# Altium PCB Wings_SMD_Breakout_0.1c.PcbDoc (part 1 of 2)
Units mm, origin at the board's own origin, x right, y up, seen from the top; angles counter-clockwise.
Board outline 50.8 x 30 mm, 2 copper layers (Top Layer, Bottom Layer), stack 1.569 mm thick; 53 components, 56 nets, 200 pads, 251 vias.
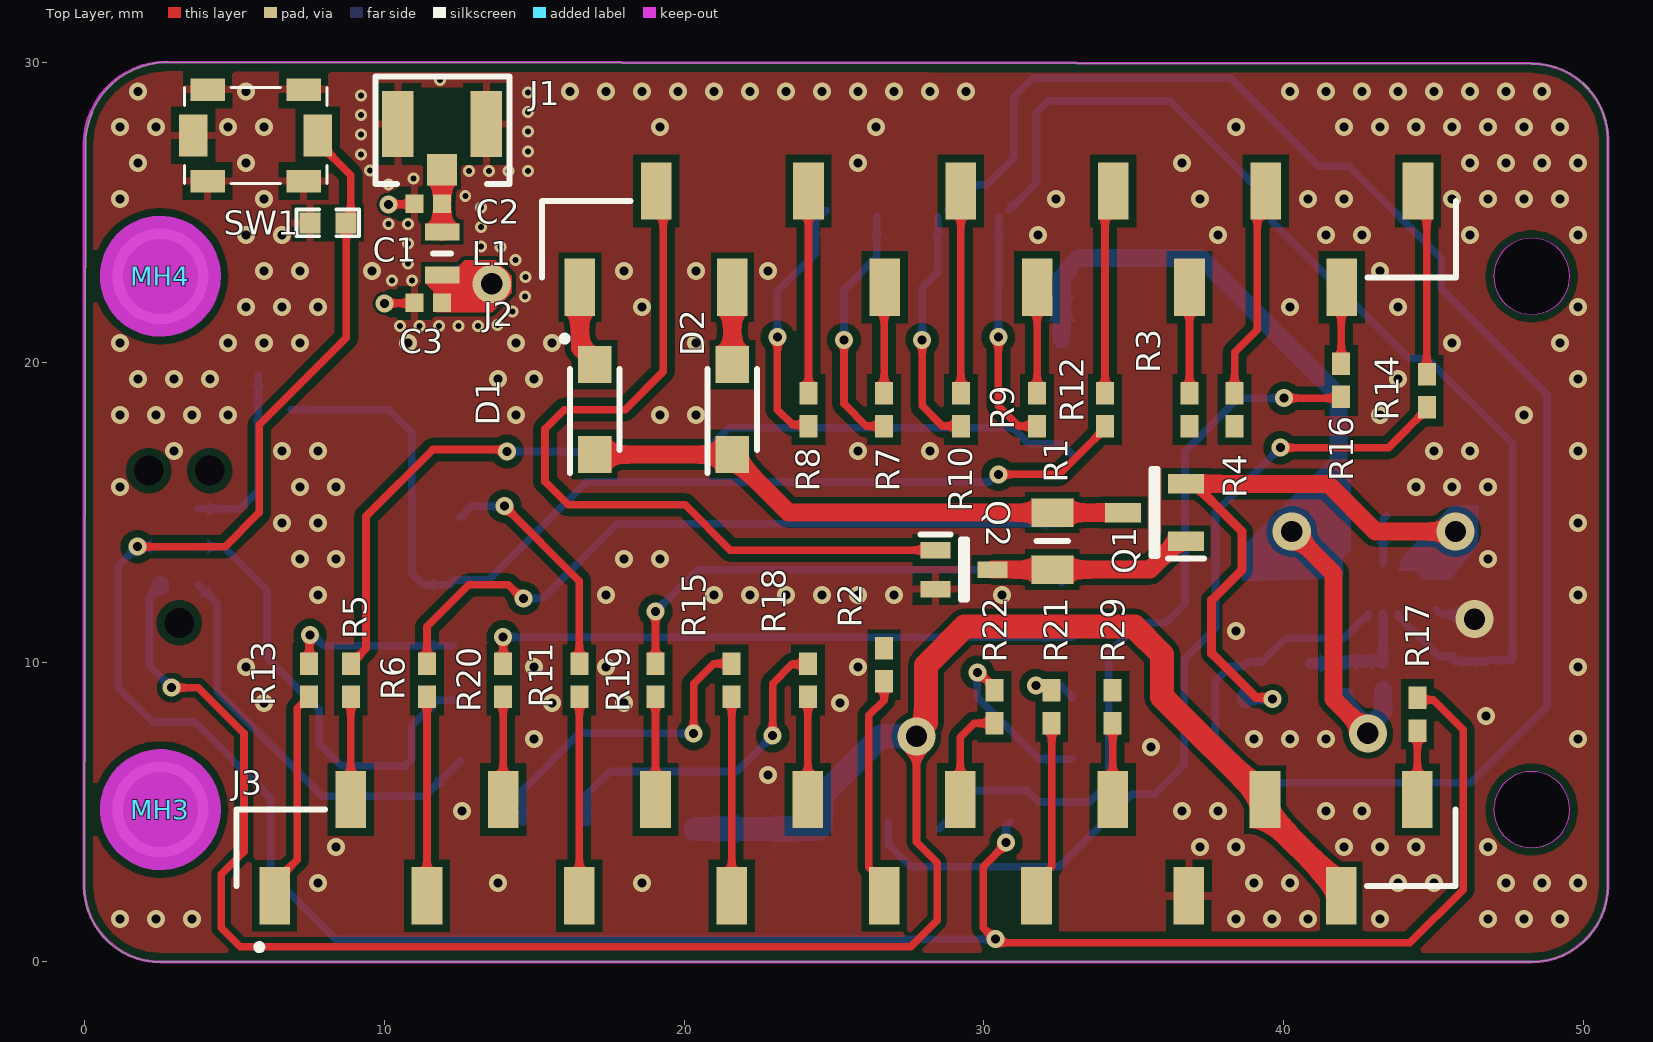
[diagram p0: Top Layer view]
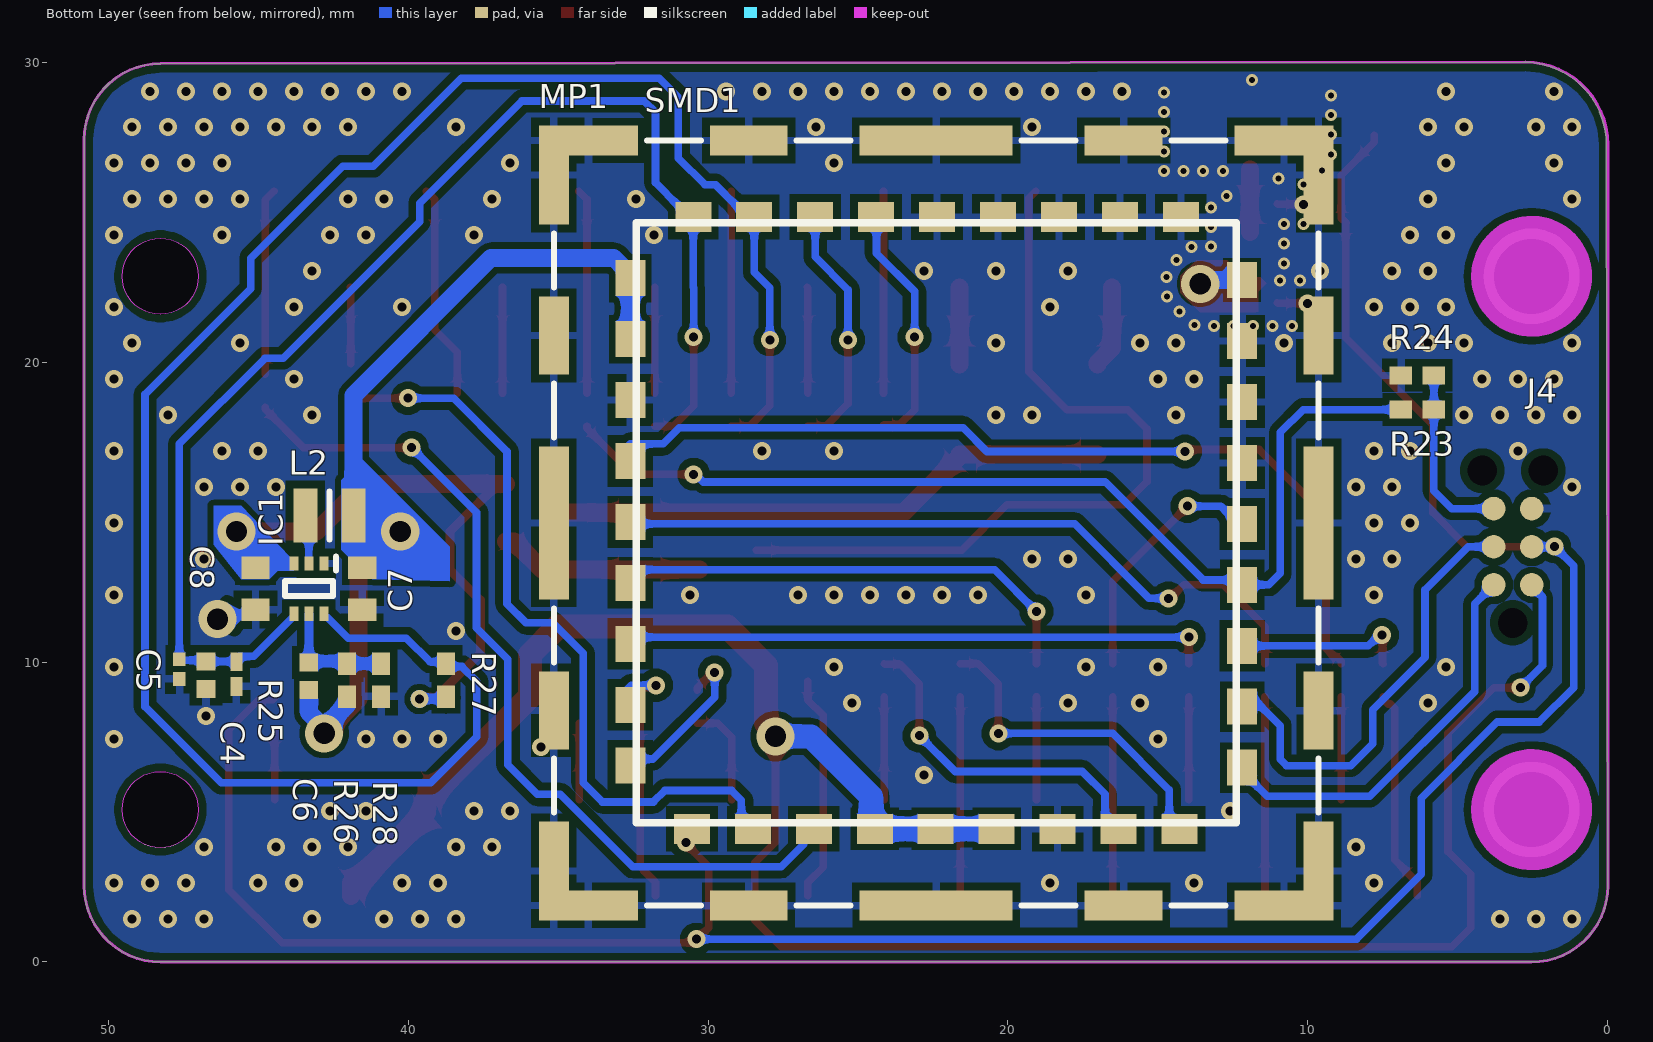
[diagram p1: Bottom Layer view, seen from below]
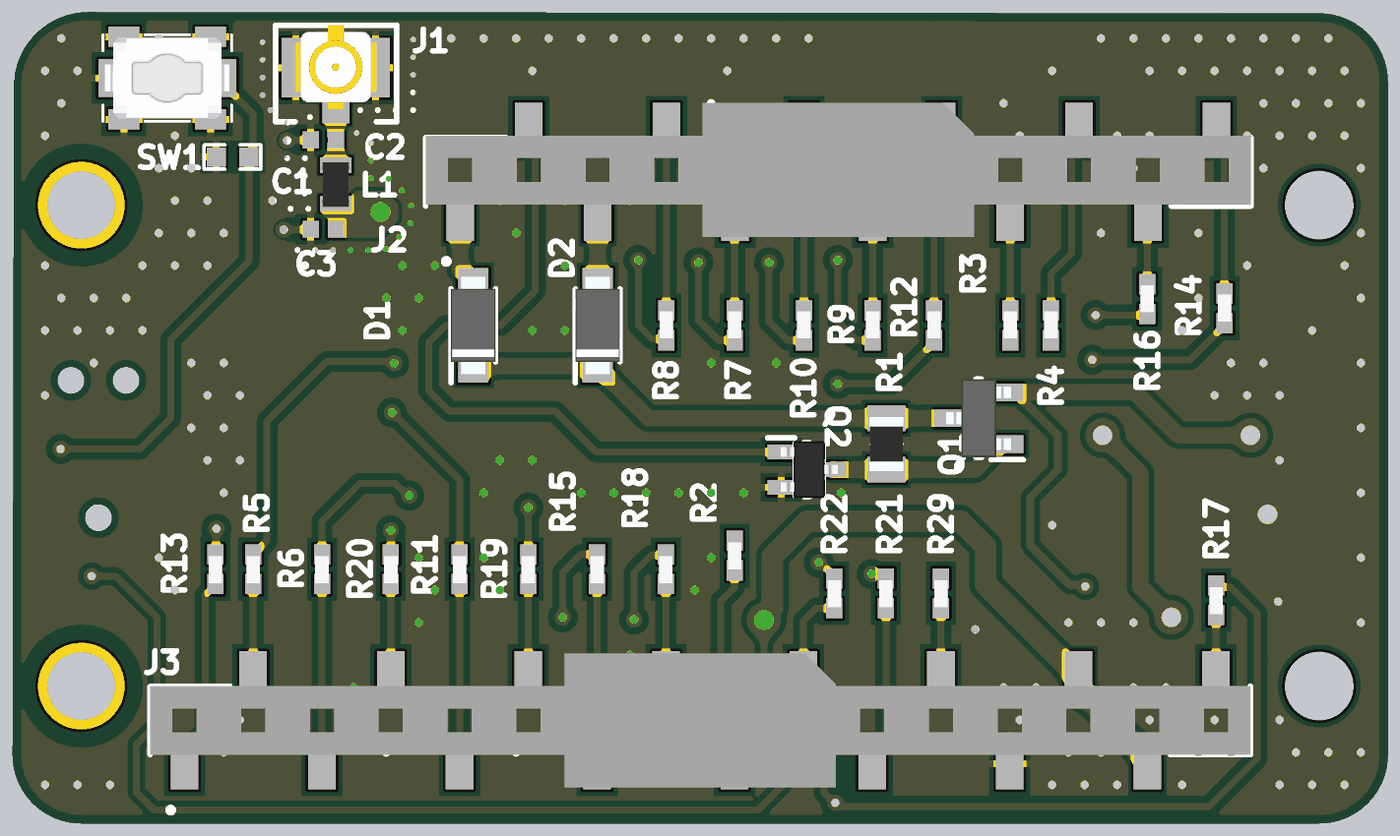
[diagram p2: 3D render of the assembled board from above, using the file's embedded part models]
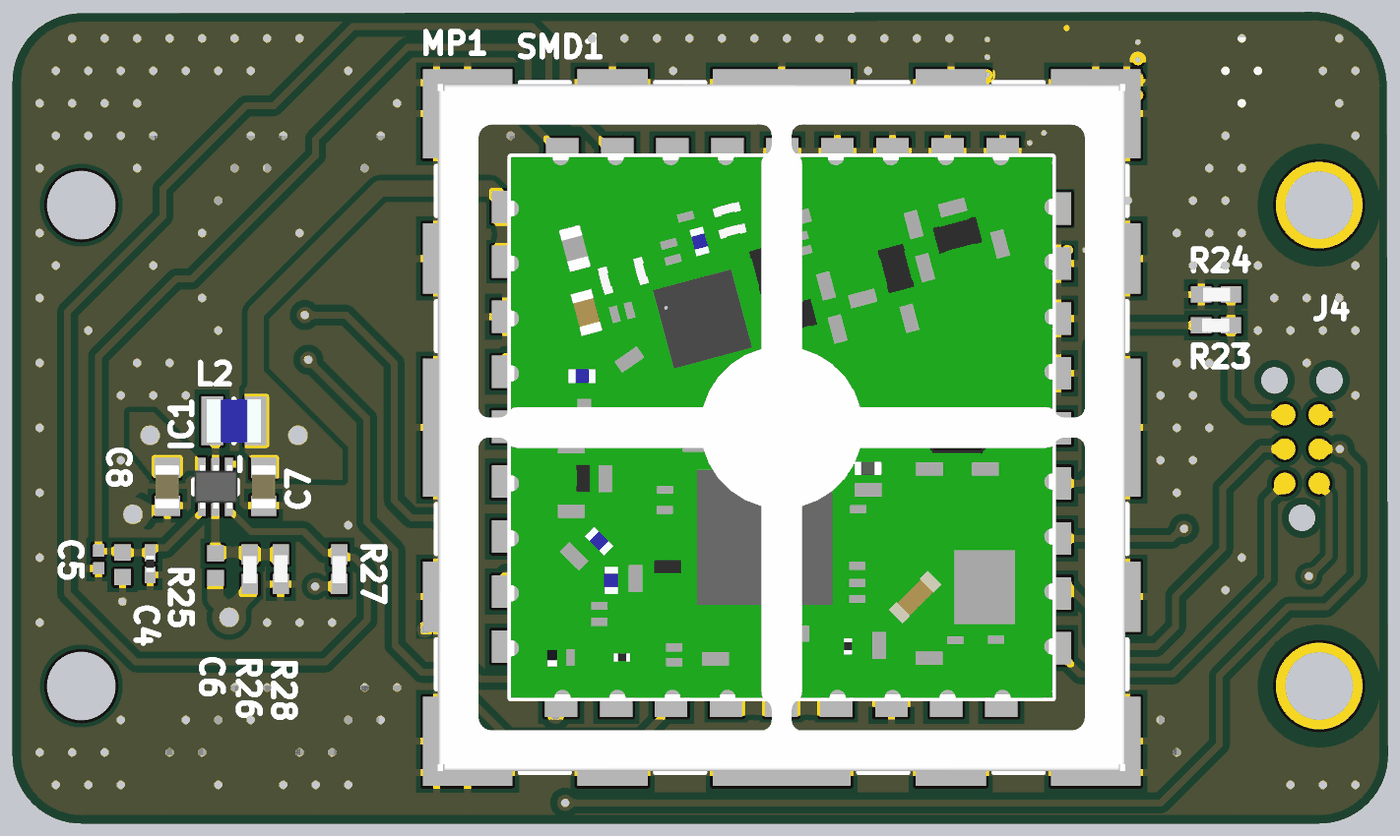
[diagram p3: 3D render of the assembled board from below, using the file's embedded part models]

## Layer stack, top to bottom
Top Solder: solder mask 0.0254, SM-001, Dk 4
Top Layer: signal copper 0.035
Dielectric 1: core 1.4986, Core-043, Dk 4.3
Bottom Layer: signal copper 0.035
Bottom Solder: solder mask 0.0254, SM-001, Dk 4

## Board outline
2.54,0 cw(c2.54,2.54) 0,2.54 0.05,27.246 cw(c2.804,27.246) 2.804,30 48.26,29.95 cw(c48.26,27.41) 50.8,27.41 50.8,2.54 cw(c48.26,2.54) 48.26,0
cut-out: 48.26,3.81 ccw(c48.26,5.08) 49.53,5.08 ccw(c48.26,5.08) 48.26,6.35 ccw(c48.26,5.08) 46.99,5.08 ccw(c48.26,5.08)
cut-out: 48.26,21.59 ccw(c48.26,22.86) 49.53,22.86 ccw(c48.26,22.86) 48.26,24.13 ccw(c48.26,22.86) 46.99,22.86 ccw(c48.26,22.86)

## Design rules (kind name [scope] priority, off if disabled: settings)
Clearance Clearance_RF [InNet('NetC2_2')or InNet('NetC3_1')] p1: gap=0.127 ignorepadtopadclearanceinfootprint=FALSE
Clearance Clearance_PWR [InNetClass('PWR')] p2: gap=0.2 ignorepadtopadclearanceinfootprint=FALSE except(0.15: Arc-SMDPad Track-SMDPad SMDPad-SMDPad)
Clearance [All] p3: gap=0.254 ignorepadtopadclearanceinfootprint=FALSE except(0.15: Arc-SMDPad Track-SMDPad SMDPad-SMDPad THPad-THPad; 0.2: Arc-Arc Arc-Track Track-Track)
MinimumSolderMaskSliver [All] p1: minsoldermaskwidth=0.1
PlaneClearance PlaneClearance_GND [InNet('GND')] p1: clearance=0
PlaneClearance [All] p2: clearance=0.508
PlaneConnect PlaneConnect_GND [InNet('GND')] p1: pad.planeconnectstyle=Relief pad.reliefexpansion=0.508 pad.reliefentries=4 pad.reliefconductorwidth=0.254 pad.reliefairgap=0.254 via.planeconnectstyle=Direct via.reliefexpansion=0.508 via.reliefentries=4 via.reliefconductorwidth=0.254 via.reliefairgap=0.254
PlaneConnect [All] p2: planeconnectstyle=Relief reliefexpansion=0.508 reliefentries=4 reliefconductorwidth=0.254 reliefairgap=0.254
PolygonConnect PolygonConnect_GND [InNet('GND') vs InNet('GND')] p1: thpad.connectstyle=Direct thpad.reliefconductorwidth=0.254 thpad.reliefentries=4 thpad.polygonreliefangle="90 Angle" thpad.airgapwidth=0.254 smdpad.connectstyle=Relief smdpad.reliefconductorwidth=0.254 smdpad.reliefentries=4 smdpad.polygonreliefangle="90 Angle" smdpad.airgapwidth=0.254 via.connectstyle=Direct via.reliefconductorwidth=0.254 via.reliefentries=4 via.polygonreliefangle="90 Angle" via.airgapwidth=0.254
PolygonConnect [All] p2: connectstyle=Relief reliefconductorwidth=0.254 reliefentries=4 polygonreliefangle="90 Angle" airgapwidth=0.254
RoutingPriority RoutingPWR [InNetClass('PWR')] p1: routingpriority=0
RoutingPriority RoutingDBG [InNetClass('UART')] p2: routingpriority=1
RoutingPriority RoutingSPI [All] p3: routingpriority=3
RoutingPriority RoutingI2C [All] p4: routingpriority=2
RoutingPriority RoutingDiGI [All] p5: routingpriority=5
RoutingPriority RoutingANALOG [All] p6: routingpriority=4
RoutingPriority RoutingALL [All] p7: routingpriority=6
RoutingVias [All] p1: holewidth=0.711 width=1.27 viastyle="Through Hole" minholewidth=0.3 minwidth=0.6 maxholewidth=0.711 maxwidth=1.27
SolderMaskExpansion [All] p1: expansion=0.102 istentingtop=FALSE
Width Width_RF [InNet('NetC2_2')or InNet('NetC3_1')] p1: maxlimit=0.8 minlimit=0.254 preferedwidth=0.6 minimp=50.000000 maximp=50.000000 favimp=50.000000
Width Width_PWR [InNetClass('PWR')] p2: maxlimit=1 minlimit=0.254 preferedwidth=0.6
Width [All] p3: maxlimit=0.4 minlimit=0.254 preferedwidth=0.254 minimp=50.000000 maximp=50.000000 favimp=50.000000
26 further rules are at their usual default settings.

## Classes and differential pairs
net class ANALOG: A0 A1 A2 A3 NetR21_1 NetR22_1
net class DIGITAL: D4 D5 D6 D9 D10 D11 D12 D13 D24 D25 DBG_RF-BUSY DBG_RF-NRST EN F_NRST NetIC1_2 NetR7_1 NetR8_1 NRST SPI_NSS VPA_EN
net class I2C: I2C_SCL I2C_SDA SCL SDA
net class SPI: D4 F_MISO F_MOSI F_SCK SPI_MISO SPI_MOSI SPI_NSS SPI_SCK
net class UART: F_RX F_TX LPUART_RX LPUART_TX
net class DBG: D9 D24 D25 DBG_RF-BUSY DBG_RF-NRST DBG_SWCLK DBG_SWDIO DBG_SWO
net class PWR: F_3V3 NetD1_1 NetQ1_1 VBAT VBUS VDD VPA_VDD
component class U_TPS62A01DRL_Buck_3V3: C4 C5 C6 C7 C8 IC1 L2 R25 R26 R27 R28
component class U_SMD_Breakout: "\"" C1 C2 C3 C? D1 D2 J1 J2 J3 J4 J? L1 MP1 Q1 Q2 R1 R2 R3 R4 R5 R6 R7 R8 R9 R10 R11 R12 R13 R14 R15 R16 R17 R18 R19 R20 R21 R22 R23 R24 R29 S SMD1 SMD? SW1 SW?

## Components (designator, comment, footprint, x,y, rotation, side; value= is the part's Value field where it differs from the comment)
C1 "GRM155R71C104KA88D" 0402 7.493,24.638 r0 top
C2 "NC" CAPC1005X55N 11.478,25.273 r0 top
C3 "CC0402BRNPO9BN3R6" CAPC1005X55N 11.478,21.971 r180 top
C4 "1uF" CAPC1005X55N 46.736,9.563 r90 bottom (schematic designator C1)
C5 "GRM033R61C104KE14D" CAPC0603X33N 47.625,9.763 r90 bottom value=100nF (schematic designator C2)
C6 "GRM1555C1H121JA01D" CAPC1005X55N 43.307,9.525 r270 bottom (schematic designator C3)
C7 "GRM188R61A226ME15J" CAPC1608X90N 41.529,12.446 r90 bottom (schematic designator C4)
C8 "GRM188Z71A475ME15D" CAPC1608X90N 45.085,12.446 r90 bottom (schematic designator C5)
D1 "MBR120LSFT3G" SODFL3616X98N 17.018,18.415 r90 top
D2 "MBR120LSFT3G" SODFL3616X98N 21.61,18.415 r90 top
IC1 "TPS62A01DRLR" SOTFL50P160X60-6N 43.307,12.446 r270 bottom
J1 "20279-001E-01" "MHF SMT REC" 11.938,27.94 r270 top
J2 "SSM-112-F-SV-P-TR" SAMTEC_SSM-112-F-SV-P-TR 30.5,24.096 r180 top
J3 "SSM-116-F-SV-P-TR" SAMTEC_SSM-116-F-SV-P-TR 25.4,3.81 r180 top
J4 "TC2030-NL" TC2030NL 3.175,11.303 r90 bottom
L1 "LQW18AN18NG8ZD" LQW18AN10NG80D 11.938,23.622 r90 top
L2 "DFE201612P-1R0M=P2" 1286ASH1R0MP2 42.625,14.883 r180 bottom (schematic designator L1)
MH3 "" MOUNTINGHOLE_2.5_PLATED#1 2.54,5.08 r270 top
MH4 "" MOUNTINGHOLE_2.5_PLATED#2 2.54,22.86 r270 top
MP1 "36103255S" 36103255S 22.392,14.638 r180 bottom
Q1 "DMG3415U-7" SOT96P240X120-3N 35.687,14.981 r180 top
Q2 "BSS138BKW,115" SOT65P210X110-3N 29.337,13.081 r0 top
R1 "RC0805JR07100KL" RESC2012X60N 32.278,14.031 r270 top
R2 "NC" RESC1005X40N 26.67,9.906 r270 top
R3 "NC" RESC1005X40N 36.85,18.415 r90 top
R4 "NC" RESC1005X40N 38.354,18.415 r90 top
R5 "0R" RESC1005X40N 8.89,9.398 r270 top
R6 "0R" RESC1005X40N 11.43,9.398 r270 top
R7 "0R" RESC1005X40N 26.67,18.415 r90 top
R8 "0R" RESC1005X40N 24.15,18.415 r90 top
R9 "0R" RESC1005X40N 31.77,18.415 r90 top
R10 "0R" RESC1005X40N 29.23,18.415 r90 top
R11 "0R" RESC1005X40N 16.51,9.398 r270 top
R12 "0R" RESC1005X40N 34.036,18.415 r90 top
R13 "0R" RESC1005X40N 7.493,9.398 r270 top
R14 "0R" RESC1005X40N 44.762,19.047 r90 top
R15 "0R" RESC1005X40N 21.59,9.398 r270 top
R16 "0R" RESC1005X40N 41.91,19.388 r90 top
R17 "NC" RESC1005X40N 44.45,8.255 r270 top
R18 "0R" RESC1005X40N 24.13,9.398 r270 top
R19 "0R" RESC1005X40N 19.05,9.398 r270 top
R20 "0R" RESC1005X40N 13.97,9.398 r270 top
R21 "0R" RESC1005X40N 32.258,8.509 r270 top
R22 "0R" RESC1005X40N 30.353,8.509 r270 top
R23 "NC" RESC1005X40N 6.35,18.415 r0 bottom
R24 "0R" RESC1005X40N 6.35,19.558 r180 bottom
R25 "100K" RESC0603X28N 45.72,9.598 r270 bottom value=100KR (schematic designator R1)
R26 "RC0402FR-07464KL" RESC1005X40N 42.037,9.398 r270 bottom (schematic designator R2)
R27 "RC0402FR-07499KL" RESC1005X40N 38.735,9.398 r270 bottom (schematic designator R3)
R28 "RT0402FRE07100KL" RESC1005X40N 40.894,9.398 r90 bottom (schematic designator R4)
R29 "NC" RESC1005X40N 34.29,8.509 r270 top (schematic designator R25)
SMD1 "stm32wl-SMD" stm32wl-SMD_shortLegs 32.392,4.638 r180 bottom
SW1 "PTS820J2x" TL1015 5.715,27.559 r0 top

## Footprints (in the part's own frame and the unit in brackets; to place one, negate y for a bottom-side part, rotate by r counter-clockwise, add the part's x,y. Pads: shape width x height; smd on the part's side, far side on the other; paste and mask are expansions set on the pad)
0402 [mm]
  rect 0.7x0.7 smd: 1(0.035,0) 2(1.233,0)
  silkscreen extent -0.41,-0.45 1.67,0.45, body extent -0.38,-0.36 1.65,0.36, height 0.82
1286ASH1R0MP2 [mm]
  rect 0.8x1.8 smd: 1(-0.8,0) 2(0.8,0)
  silkscreen extent 0,-0.8 0,0.8, body extent -1,-0.8 1,0.8, height 1.2
36103255S [mm] "Shielding Cabinet, SMD Frame, 25.4x25.4mm"
  rect 1x3.3 smd: 1(-12.75,-11.6) 1(-12.75,11.6) 1(12.75,-11.6) 1(12.75,11.6)
  rect 1x2.6 smd: 1(-12.75,-6.25) 1(-12.75,6.25) 1(12.75,-6.25) 1(12.75,6.25)
  rect 1x5.1 smd: 1(-12.75,0) 1(12.75,0)
  rect 3.3x1 smd: 1(-11.6,-12.75) 1(-11.6,12.75) 1(11.6,-12.75) 1(11.6,12.75)
  rect 2.6x1 smd: 1(-6.25,-12.75) 1(-6.25,12.75) 1(6.25,-12.75) 1(6.25,12.75)
  rect 5.1x1 smd: 1(0,-12.75) 1(0,12.75)
  silkscreen extent -12.75,-12.75 12.75,12.75, body extent -12.7,-12.7 12.7,12.7, height 3.2
CAPC0603X33N [mm]
  rect 0.46x0.42 smd: 1(-0.33,0) 2(0.33,0)
  body extent -0.3,-0.15 0.3,0.15, height 0.33
CAPC1005X55N [mm]
  rect 0.6x0.62 smd: 1(-0.46,0) 2(0.46,0)
  body extent -0.5,-0.25 0.5,0.25, height 0.55
CAPC1608X90N [mm]
  rect 0.75x0.94 smd: 1(-0.7,0) 2(0.7,0)
  body extent -0.8,-0.45 0.8,0.45, height 0.8
LQW18AN10NG80D [mm]
  rect 0.57x1.15 smd: 1(-0.715,0) 2(0.715,0)
  silkscreen extent 0,-0.3 0,0.3, body extent -0.82,-0.5 0.82,0.5, height 0.9
"MHF SMT REC" [mm]
  rect 1.05x1 smd: 1(1.525,0)
  rect 2.2x1.05 smd: 2(0,1.475) 3(0,-1.475)
  Top Layer pour cut-out: -1.2,0.95 1,0.95 1,-0.95 -1.2,-0.95
  silkscreen extent -1.58,-2.22 2,2.25, body extent -1.57,-1.5 1.53,1.5, height 1.27
MOUNTINGHOLE_2.5_PLATED#1 [mm] "MOUNTINGHOLE_2.5_PLATED"
  round 3.2 hole 2.5 mask+0.102: MH3(0,0)
  Top Layer keep-out circle w2.032: c0,0 r1
  Top Layer keep-out circle w2.032: c0,0 r1
  Bottom Layer keep-out circle w2.032: c0,0 r1
  Bottom Layer keep-out circle w2.032: c0,0 r1
MOUNTINGHOLE_2.5_PLATED#2 [mm] "MOUNTINGHOLE_2.5_PLATED"
  round 3.2 hole 2.5: MH4(0,0)
  Top Layer keep-out circle w2.032: c0,0 r1
  Top Layer keep-out circle w2.032: c0,0 r1
  Bottom Layer keep-out circle w2.032: c0,0 r1
  Bottom Layer keep-out circle w2.032: c0,0 r1
RESC0603X28N [mm]
  rect 0.625x0.4 smd: 1(-0.412,0) 2(0.412,0)
  body extent -0.3,-0.15 0.3,0.15, height 0.28
RESC1005X40N [mm]
  rect 0.75x0.6 smd: 1(-0.55,0) 2(0.55,0)
  body extent -0.49,-0.25 0.51,0.25, height 0.35
RESC2012X60N [mm]
  rect 0.95x1.4 smd: 1(-0.95,0) 2(0.95,0)
  silkscreen extent 0,-0.53 0,0.53, body extent -1,-0.63 1,0.63, height 0.6
SAMTEC_SSM-112-F-SV-P-TR [mm]
  rect 1.02x1.905 smd: 01(13.97,1.603) 02(11.43,-1.603) 03(8.89,1.603) 04(6.35,-1.603) 05(3.81,1.603) 06(1.27,-1.603) 07(-1.27,1.603) 08(-3.81,-1.603) 09(-6.35,1.603) 10(-8.89,-1.603) 11(-11.43,1.603) 12(-13.97,-1.603)
  silkscreen extent -15.24,-1.27 15.24,3.41, body extent -15.24,-2.54 15.24,2.41, height 8.64
SAMTEC_SSM-116-F-SV-P-TR [mm]
  rect 1.02x1.905 smd: 01(19.05,1.603) 02(16.51,-1.603) 03(13.97,1.603) 04(11.43,-1.603) 05(8.89,1.603) 06(6.35,-1.603) 07(3.81,1.603) 08(1.27,-1.603) 09(-1.27,1.603) 10(-3.81,-1.603) 11(-6.35,1.603) 12(-8.89,-1.603) 13(-11.43,1.603) 14(-13.97,-1.603) 15(-16.51,1.603) 16(-19.05,-1.603)
  silkscreen extent -20.32,-1.27 20.32,3.41, body extent -20.32,-2.48 20.32,2.48, height 8.64
SODFL3616X98N [mm]
  rect 1.24x1.12 smd: 1(-1.5,0) 2(1.5,0)
  silkscreen extent -2.12,-0.82 1.35,0.82, body extent -1.8,-0.82 1.8,0.82, height 0.98
SOT65P210X110-3N [mm]
  rect 1x0.55 smd: 1(-0.95,0.65) 2(-0.95,-0.65) 3(0.95,0)
  silkscreen extent -1.45,-1 0.1,1.17, body extent -0.96,-1.05 1.14,1.05, height 0.93
SOT96P240X120-3N [mm]
  rect 1.2x0.65 smd: 1(-1.05,0.96) 2(-1.05,-0.96) 3(1.05,0)
  silkscreen extent -1.65,-1.45 0.1,1.54, body extent -1.2,-1.45 1.2,1.45, height 1.2
SOTFL50P160X60-6N [mm]
  rect 0.475x0.3 smd: 1(-0.838,0.5) 2(-0.838,0) 3(-0.838,-0.5) 4(0.838,-0.5) 5(0.838,0) 6(0.838,0.5)
  silkscreen extent -1.07,-0.8 0.25,0.9, body extent -0.8,-0.78 0.8,0.82, height 0.6
stm32wl-SMD_shortLegs [mm]
  rect 1x1.2 smd: 0(-0.2,1.905) 1(-0.2,3.937) 2(-0.2,5.969) 3(-0.2,8.001) 4(-0.2,10.033) 5(-0.2,12.065) 6(-0.2,14.097) 7(-0.2,16.129) 8(-0.2,18.161) 18(20.2,18.095) 19(20.2,16.063) 20(20.2,14.031) 21(20.2,11.999) 22(20.2,9.967) 23(20.2,7.935) 24(20.2,5.903) 25(20.2,3.871) 26(20.2,1.839)
  rect 1.2x1 smd: 9(1.9,20.2) 10(3.932,20.2) 11(5.964,20.2) 12(7.996,20.2) 13(10.028,20.2) 14(12.06,20.2) 15(14.092,20.2) 16(16.124,20.2) 17(18.156,20.2) 27(18.111,-0.2) 28(16.079,-0.2) 29(14.047,-0.2) 30(12.015,-0.2) 31(9.983,-0.2) 32(7.951,-0.2) 33(5.919,-0.2) 34(3.887,-0.2) 35(1.855,-0.2)
  silkscreen extent 0,0 20,20, body extent 0,0 20,20, height 2.05
TC2030NL [mm]
  round 0.787 smd paste-0.787: 1(1.27,-0.635) 2(1.27,0.635) 3(2.54,-0.635) 4(2.54,0.635) 5(3.81,-0.635) 6(3.81,0.635)
  round 0.65 hole 0.991 unplated: H1(0,0) H2(5.08,1.016) H3(5.08,-1.016)
TL1015 [mm]
  rect 0.95x1.4 smd: 1(-2.075,0) 2(2.075,0)
  rect 1.15x0.75 smd: G1(-1.6,1.525) G2(1.6,1.525) G3(1.6,-1.525) G4(-1.6,-1.525)
  silkscreen extent -2.37,-1.6 2.37,1.6, body extent -2.3,-1.5 2.3,1.5, height 2

## Part data
C1: "Multilayer Ceramic Capacitors MLCC - SMD/SMT 0.1 uF 16 VDC 10% 0402 X7R", Capacitance=100nF, Case Code (Imperial)=0402, Case Code (Metric)=1005, Dielectric=X7R, Dielectric Material=Ceramic, Manufacturer=YAGEO, Manufacturer 1=Murata, Manufacturer_Part_Number=CC0402KRX7R7BB104, Max Operating Temperature=125°C, Min Operating Temperature=-55°C, Package=C0402, Package Quantity=1, Supplier Part Number 1=81-GRM155R71C104KA88, Tolerance=10%, Voltage=16V, Case/Package=0402, Category 1="Ceramic Capacitors", ComponentLink1Description=https://datasheet.ciiva.com/129/grm155r71c104ka88-01-129739.pdf?src-supplier=Digi-Key, ComponentLink1URL=https://datasheet.ciiva.com/129/grm155r71c104ka88-01-129739.pdf?src-supplier=Digi-Key, ComponentLink2Description=https://datasheet.ciiva.com/129/grm155r71c104ka88-01-129740.pdf?src-supplier=Digi-Key, ComponentLink2URL=https://datasheet.ciiva.com/129/grm155r71c104ka88-01-129740.pdf?src-supplier=Digi-Key, ComponentLink3Description=https://datasheet.ciiva.com/29199/454098-da-01-en-vs-kondensator-0402-29199799.pdf?src-supplier=Conrad, ComponentLink3URL=https://datasheet.ciiva.com/29199/454098-da-01-en-vs-kondensator-0402-29199799.pdf?src-supplier=Conrad, ComponentLink4Description=https://datasheet.ciiva.com/7937/4360-7937615.pdf?src-supplier=Element14, ComponentLink4URL=https://datasheet.ciiva.com/7937/4360-7937615.pdf?src-supplier=Element14, ComponentLink5Description=https://datasheet.ciiva.com/14116/grmseries-highdielectrictype-eng-14116878.pdf?src-supplier=Distrelec, ComponentLink5URL=https://datasheet.ciiva.com/14116/grmseries-highdielectrictype-eng-14116878.pdf?src-supplier=Distrelec, ComponentLink6Description=https://datasheet.ciiva.com/14103/grmseries-highdielectrictype-eng-14103750.pdf?src-supplier=Distrelec, ComponentLink6URL=https://datasheet.ciiva.com/14103/grmseries-highdielectrictype-eng-14103750.pdf?src-supplier=Distrelec, ComponentLink7Description=https://datasheet.ciiva.com/28534/4360-28534127.pdf?src-supplier=Element14, ComponentLink7URL=https://datasheet.ciiva.com/28534/4360-28534127.pdf?src-supplier=Element14, ComponentLink8Description=https://datasheet.ciiva.com/28534/4360-28534133.pdf?src-supplier=Element14, ComponentLink8URL=https://datasheet.ciiva.com/28534/4360-28534133.pdf?src-supplier=Element14, Depth=0.5mm, Description 1="0402 0.1 uF 16V ±10 % Tolerance X7R SMT Multilayer Ceramic Capacitor", Height=0.5mm, Lead Free="Lead Free", Length=1mm, Manufacturer Part Number 1=GRM155R71C104KA88D, Material=Ceramic, Mount="Surface Mount", Number of Pins=2, Packaging="Tape and Reel", Pricing 1="1=0,1, 10=0,017, 50=0,017, 100=0,01, 1000=0,008, 10000=0,005 (USD)", Radiation Hardening=No, Reach SVHC Compliant=Unknown, RoHS 1=Yes, RoHS Compliant=Yes, Series=GRM, Stock 1=7816691, Supplier 1=Mouser, Termination=SMD/SMT, Thickness=0.022inch, Voltage Rating=16V, Voltage Rating (DC)=16V, Width=0.02inch
C2: library part GEN_CAP_0402, "Generic capacitor", ComponentLink1Description=Mouser, ComponentLink1URL=https://www.mouser.fr/ProductDetail/Murata-Electronics/GCM1555C1H4R7CA16D?qs=jDWTHf1mkXZYnVNtgyfFgw%3D%3D
C3: "Multilayer Ceramic Capacitors MLCC - SMD/SMT 50 V 3.6pF C0G 0402 Tol 0.1pF", Manufacturer_Name=KEMET, Mouser Part Number=603-CC402BRNPO9BN3R6, Arrow Part Number=CC0402BRNPO9BN3R6, Arrow Price/Stock=https://www.arrow.com/en/products/cc0402brnpo9bn3r6/yageo, Datasheet Link=https://www.yageo.com/upload/media/product/productsearch/datasheet/mlcc/UPY-GP_NP0_16V-to-50V_18.pdf, Height=0.55mm, Manufacturer_Part_Number=CC0402BRNPO9BN3R6, Mouser Price/Stock=https://www.mouser.co.uk/ProductDetail/Yageo/CC0402BRNPO9BN3R6?qs=57cj7OiSijl%2FHGuB4N4%2Few%3D%3D
C4: library part GRM155Z71A105KE01J, "Multilayer Ceramic Capacitors MLCC - SMD/SMT 1.0UF 10V 10% 0402", Manufacturer 1=Murata, Manufacturer_Name="Murata Electronics", Mouser Part Number=81-GRM155Z71A105KE1J, Arrow Part Number=GRM155Z71A105KE01J, Arrow Price/Stock=https://www.arrow.com/en/products/grm155z71a105ke01j/murata-manufacturing?region=nac, Category 1="Ceramic Capacitors", Datasheet Link=http://www.murata.com/~/media/webrenewal/support/library/catalog/products/capacitor/mlcc/c02e.pdf, Description 1="Multi-Layer Ceramic Capacitor 1uF X7R 10% 0402 Paper T/R", Height=0.55mm, Manufacturer Part Number 1=GRM155Z71A105KE01J, Manufacturer_Part_Number=GRM155Z71A105KE01J, Mouser Price/Stock=https://www.mouser.co.uk/ProductDetail/Murata-Electronics/GRM155Z71A105KE01J?qs=xZ%2FP%252Ba9zWqaF%2FmyRgV0iOA%3D%3D, Pricing 1="1=0,1, 10=0,069, 50=0,069, 100=0,031, 1000=0,018, 10000=0,013 (USD)", RoHS 1=Yes, Stock 1=804340, Supplier 1=Mouser, Supplier Part Number 1=81-GRM155Z71A105KE1J
C5: "Multilayer Ceramic Capacitors MLCC - SMD/SMT 0201 0.1uF 16volts X5R 10%", Capacitance=100nF, Case Code (Imperial)=0201, Case Code (Metric)=0603, Dielectric=X5R, Manufacturer 1=Murata, Manufacturer_Name="Murata Electronics", Max Operating Temperature=85°C, Min Operating Temperature=-55°C, Mouser Part Number=81-GRM033R61C104KE4D, Tolerance=10%, Voltage Rating=16V, Case/Package=0201, Category 1="Ceramic Capacitors", ComponentLink1Description=http://www.farnell.com/datasheets/2735408.pdf?src-supplier=Farnell, ComponentLink1URL=http://www.farnell.com/datasheets/2735408.pdf?src-supplier=Farnell, ComponentLink2Description=https://search.murata.co.jp/Ceramy/image/img/A01X/G101/ENG/GRM033R61C104KE14-01.pdf?src-supplier=Digi-Key, ComponentLink2URL=https://search.murata.co.jp/Ceramy/image/img/A01X/G101/ENG/GRM033R61C104KE14-01.pdf?src-supplier=Digi-Key, ComponentLink3Description=http://www.farnell.com/datasheets/2735408.pdf?src-supplier=Newark, ComponentLink3URL=http://www.farnell.com/datasheets/2735408.pdf?src-supplier=Newark, ComponentLink4Description=http://search.murata.co.jp/Ceramy/image/img/A01X/G101/ENG/GRM033R61C104KE14-01.pdf?src-supplier=Digi-Key, ComponentLink4URL=http://search.murata.co.jp/Ceramy/image/img/A01X/G101/ENG/GRM033R61C104KE14-01.pdf?src-supplier=Digi-Key, Datasheet Link=http://www.murata.com/~/media/webrenewal/support/library/catalog/products/capacitor/mlcc/c02e.pdf, Description 1="0201 16 V 0.1 uF ±10% Tolerance X5R Dielectric Multilayer Ceramic Chip Capacitor", Geometry.Height=0.33mm, Length=600um, Manufacturer Part Number 1=GRM033R61C104KE14D, Manufacturer_Part_Number=GRM033R61C104KE14D, Mount="Surface Mount", Mouser Price/Stock=https://www.mouser.co.uk/ProductDetail/Murata-Electronics/GRM033R61C104KE14D?qs=jHkklCh7amhDvY8zUHp0eA%3D%3D, Packaging="Tape and Reel", Pricing 1="1=0,1, 10=0,019, 50=0,019, 100=0,011, 1000=0,009, 10000=0,007 (USD)", RoHS 1=Yes, RoHS Compliant=Yes, Series=GRM, Stock 1=2429607, Supplier 1=Mouser, Supplier Part Number 1=81-GRM033R61C104KE4D, Thickness=300um, Voltage Rating (DC)=16V, Width=300um
C6: "Multilayer Ceramic Capacitors MLCC - SMD/SMT 120 pF 50 VDC 5% 0402 C0G (NP0)", Manufacturer=Murata, Manufacturer_Name="Murata Electronics", Mouser Part Number=81-GRM1555C1H121JA01, Arrow Part Number=GRM1555C1H121JA01D, Arrow Price/Stock=https://www.arrow.com/en/products/grm1555c1h121ja01d/murata-manufacturing?region=nac, Category="Ceramic Capacitors", ComponentLink1Description=https://datasheet.ciiva.com/5413/product-5413480.pdf?src-supplier=Mouser, ComponentLink1URL=https://datasheet.ciiva.com/5413/product-5413480.pdf?src-supplier=Mouser, ComponentLink2Description=https://datasheet.ciiva.com/18184/getdatasheetpartid-153048-18184189.pdf?src-supplier=Verical, ComponentLink2URL=https://datasheet.ciiva.com/18184/getdatasheetpartid-153048-18184189.pdf?src-supplier=Verical, ComponentLink3Description=https://datasheet.ciiva.com/29200/453593-da-01-en-vs-kondensator-0402-29200134.pdf?src-supplier=Conrad, ComponentLink3URL=https://datasheet.ciiva.com/29200/453593-da-01-en-vs-kondensator-0402-29200134.pdf?src-supplier=Conrad, ComponentLink4Description=https://datasheet.ciiva.com/14116/grmseries-tc-hitype-eng-14116921.pdf?src-supplier=Distrelec, ComponentLink4URL=https://datasheet.ciiva.com/14116/grmseries-tc-hitype-eng-14116921.pdf?src-supplier=Distrelec, ComponentLink5Description=https://datasheet.ciiva.com/14116/grmseries-tc-hitype-eng-14116860.pdf?src-supplier=Distrelec, ComponentLink5URL=https://datasheet.ciiva.com/14116/grmseries-tc-hitype-eng-14116860.pdf?src-supplier=Distrelec, ComponentLink6Description=https://datasheet.ciiva.com/131/partnumbering-e-01-131099.pdf?src-supplier=Digi-Key, ComponentLink6URL=https://datasheet.ciiva.com/131/partnumbering-e-01-131099.pdf?src-supplier=Digi-Key, ComponentLink7Description=https://datasheet.ciiva.com/131/partnumbering-e-01-131100.pdf?src-supplier=Digi-Key, ComponentLink7URL=https://datasheet.ciiva.com/131/partnumbering-e-01-131100.pdf?src-supplier=Digi-Key, ComponentLink8Description=https://datasheet.ciiva.com/131/partnumbering-e-01-131101.pdf?src-supplier=Digi-Key, ComponentLink8URL=https://datasheet.ciiva.com/131/partnumbering-e-01-131101.pdf?src-supplier=Digi-Key, ComponentLink9Description=https://datasheet.ciiva.com/2989/product-2989291.pdf?src-supplier=Avnet, ComponentLink9URL=https://datasheet.ciiva.com/2989/product-2989291.pdf?src-supplier=Avnet, Datasheet Link=http://www.murata.com/~/media/webrenewal/support/library/catalog/products/capacitor/mlcc/c02e.pdf, Height=0.55mm, Manufacturer Part Number=GRM1555C1H121JA01D, Manufacturer_Part_Number=GRM1555C1H121JA01D, Mouser Price/Stock=https://www.mouser.co.uk/ProductDetail/Murata-Electronics/GRM1555C1H121JA01D?qs=%2FOTtAhf8R8aYiiN7oJJViQ%3D%3D, Pricing 1="10000=0,0097, 20000=0,0083, 50000=0,0082, 100000=0,0071, 250000=0,0069 (USD)", RoHS=Yes, Stock 1=100000, Supplier 1="Arrow Electronics"
C7: "Multilayer Ceramic Capacitors MLCC - SMD/SMT 22 uF 10 VDC 20% 0603 X5R", Capacitance=22uF, Case/Package=0603, Dielectric=X5R, Manufacturer=Murata, Manufacturer_Name="Murata Electronics", Max Operating Temperature=85°C, Min Operating Temperature=-55°C, Mouser Part Number=81-GRM188R61A226ME5J, Tolerance=20%, Voltage Rating=10V, Arrow Part Number=GRM188R61A226ME15J, Arrow Price/Stock=https://www.arrow.com/en/products/grm188r61a226me15j/murata-manufacturing?region=nac, Category="Ceramic Capacitors", ComponentLink1Description=http://search.murata.co.jp/Ceramy/image/img/A01X/G101/ENG/GRM188R61A226ME15-01.pdf?src-supplier=Digi-Key, ComponentLink1URL=http://search.murata.co.jp/Ceramy/image/img/A01X/G101/ENG/GRM188R61A226ME15-01.pdf?src-supplier=Digi-Key, Datasheet Link=http://componentsearchengine.com/Datasheets/1/GRM188R61A226ME15J.pdf, Height=0.9mm, Length=1.6mm, Manufacturer Part Number=GRM188R61A226ME15J, Manufacturer_Part_Number=GRM188R61A226ME15J, Mount="Surface Mount", Mouser Price/Stock=https://www.mouser.co.uk/ProductDetail/Murata-Electronics/GRM188R61A226ME15J?qs=QzBtWTOodeUZmjqoH8BLhQ%3D%3D, Pricing 1="1=0,1632, 10=0,0758, 25=0,075, 100=0,0444, 250=0,0422, 500=0,0395, 1000=0,0349, 3000=0,0314 (USD)", RoHS=Yes, RoHS Compliant=Yes, Series=GRM, Stock 1=3913, Supplier 1="Arrow Electronics", Supplier Part Number 1=GRM188R61A226ME15J, Thickness=800um, Voltage Rating (DC)=10V, Width=800um
C8: "Cap, 4.7Uf, 10V, Mlcc, 0603 Rohs Compliant: Yes", Case/Package=0603, Manufacturer=Murata, Manufacturer_Name="Murata Electronics", Mouser Part Number=81-GRM188Z71A475ME5D, Category="Ceramic Capacitors", Datasheet Link=http://componentsearchengine.com/Datasheets/1/GRM188Z71A475ME15D.pdf, Height=0.9mm, Manufacturer Part Number=GRM188Z71A475ME15D, Manufacturer_Part_Number=GRM188Z71A475ME15D, Mouser Price/Stock=https://www.mouser.co.uk/ProductDetail/Murata-Electronics/GRM188Z71A475ME15D?qs=Ey7%2FXF42M3f7ZZnF1u%2FoMQ%3D%3D, Pricing 1="1=0,2, 10=0,139, 50=0,0928, 100=0,0789, 500=0,0557, 1000=0,04873 (USD)", RoHS=Yes, Stock 1=6936, Supplier 1=Digi-Key
D1 D2: "Diode", Manufacturer_Name=onsemi, Mouser Part Number=863-MBR120LSFT3G, Arrow Part Number=MBR120LSFT3G, Arrow Price/Stock=https://www.arrow.com/en/products/mbr120lsft3g/on-semiconductor?region=nac, Datasheet Link=http://www.onsemi.com/pub/Collateral/MBR120LSFT1-D.PDF, Height=0.98mm, Manufacturer_Part_Number=MBR120LSFT3G, Mouser Price/Stock=https://www.mouser.co.uk/ProductDetail/onsemi/MBR120LSFT3G?qs=3JMERSakebrl0QzFyBgvHg%3D%3D
IC1: "Integrated Circuit", Manufacturer_Name="Texas Instruments", Mouser Part Number=595-TPS62A01DRLR, Arrow Part Number=TPS62A01DRLR, Arrow Price/Stock=https://www.arrow.com/en/products/tps62a01drlr/texas-instruments?region=nac, Datasheet Link=https://www.arrow.com/en/products/tps62a01drlr/texas-instruments?region=nac, Height=0.6mm, Manufacturer_Part_Number=TPS62A01DRLR, Mouser Price/Stock=https://www.mouser.co.uk/ProductDetail/Texas-Instruments/TPS62A01DRLR?qs=Znm5pLBrcALcIfh%2FYrJRtw%3D%3D
J1: "CON IPEX MHF SMT RECEPTACLE RF DC - 6GHZ VSWR: 1.3 max. at 0.1-3GHz; VSWR: 1.5 max. at 3-6GHz", Frequency Range="DC - 6GHz", Manufacturer=Taoglas, Manufacturers Part Number=RECE-20279-001E-01, Supplier Part Number 1=931-1107-1-ND, Distributor 1=EBV, Distributor 2="Future Electronics", Size=MHF, Supplier 1=Digi-Key, Supplier 2=Mouser, Supplier Part Number 2=960-RECE20279001E01
J2: "Headers & Wire Housings Surface Mount PCB Socket Strips, .100\" pitch"
J3: "Headers & Wire Housings Surface Mount PCB Socket Strips, .100\" pitch", Supplier Part Number 1=SSM-116-F-SV-P-ND, Supplier 1=Digi-Key, Supplier 2=Digi-Key, Supplier Part Number 2=SSM-116-F-SV-ND
J4: "CON PLUG OF NAILS 6 PIN FOOTPRINT NO LEGS", Manufacturer=Tag-Connect, Manufacturers Part Number="NOT FITTED PART", Distributor 1=EBV, Distributor 2="Future Electronics", Supplier Part Number 1="NOT FITTED PART", Supplier Part Number 2="NOT FITTED PART"
L1: "Inductor Wirewound , 18 nH, 75 Milliohm, ± 2%, 1.4 A, 0603 [1608 Metric]"
L2: "Inductor Power Shielded Wirewound 1uH 20% 1MHz Metal 2.7A 0.054Ohm DCR 0806 T/R", Case Code (Imperial)=0806, Case Code (Metric)=2016, Current Rating=3.3A, DC Resistance (DCR)=54mR, Inductance=1uH, Manufacturer=Murata, Manufacturer Part Number=DFE201612P-1R0M=P2, Max DC Current=2.7A, Max Operating Temperature=125°C, Min Operating Temperature=-40°C, Test Frequency=1MHz, Tolerance=20%, Case/Package=0806, Category="Fixed Inductors", ComponentLink1Description=https://search.murata.co.jp/Ceramy/image/img/P02/J(E)TE243A-0033.pdf?src-supplier=Digi-Key, ComponentLink1URL=https://search.murata.co.jp/Ceramy/image/img/P02/J(E)TE243A-0033.pdf?src-supplier=Digi-Key, ComponentLink2Description=http://www.toko.co.jp/products/pdf/inductors/dfe201612p.pdf?src-supplier=Digi-Key, ComponentLink2URL=http://www.toko.co.jp/products/pdf/inductors/dfe201612p.pdf?src-supplier=Digi-Key, ComponentLink3Description=http://www.toko.co.jp/products/pdf/inductors/dfe201612p.pdf?src-supplier=Avnet, ComponentLink3URL=http://www.toko.co.jp/products/pdf/inductors/dfe201612p.pdf?src-supplier=Avnet, Core Material=Ferrite, Depth=1.6mm, Height - Seated (Max)=0.039inch, Length=0.079inch, Mount="Surface Mount", Packaging="Cut Tape", Pricing 1="1=0,3131, 10=0,2081, 25=0,206, 100=0,1586, 250=0,1571 (USD)", RoHS=Yes, RoHS Compliant=Yes, Series=DFE201612P, Shielding=Shielded, Stock 1=437, Supplier 1="Arrow Electronics", Width=0.063inch
MH3 MH4: library part MOUNTINGHOLE_2.5_PLATED, PackageName=MOUNTINGHOLE_2.5_PLATED
MP1: "WE-SHC Shielding Cabinet, SMT Frame, Tin Plated, Tray, 25x25x3mm", Manufacturer="Wurth Elektronik", Operating Temperature Max=125°C, Operating Temperature Min=-40°C, Base Material=Steel, Category="EMC Shielding", ComponentLink1Description="Website Link", ComponentLink1URL=https://www.we-online.com/redexpert/article/36103255S?ad, ComponentLink2Description="Datasheet Link", ComponentLink2URL=https://www.we-online.com/redexpert/spec/36103255S?ad, Height=3mm, Length=25mm, Manufacturer Part Number=36103255S, Match Code=WE-SHC, Mount="Surface Mount", Packaging=Tray, Plating="Tin Plated", Type="SMT Frame", Width=25mm
Q1: "MOSFET (P-Channel)", Manufacturer_Name="Diodes Inc.", Mouser Part Number=621-DMG3415U-7, Arrow Part Number=DMG3415U-7, Arrow Price/Stock=https://www.arrow.com/en/products/dmg3415u-7/diodes-incorporated?region=nac, Datasheet Link=https://datasheet.datasheetarchive.com/originals/distributors/Datasheets-DGA23/1579852.pdf, Height=1.2mm, Manufacturer_Part_Number=DMG3415U-7, Mouser Price/Stock=https://www.mouser.co.uk/ProductDetail/Diodes-Incorporated/DMG3415U-7?qs=oUsD4qhOtFwqFLkI6WCRAA%3D%3D
Q2: "MOSFET (N-Channel)", Manufacturer_Name=Nexperia, Mouser Part Number=771-BSS138BKW115, Arrow Part Number=BSS138BKW,115, Arrow Price/Stock=https://www.arrow.com/en/products/bss138bkw115/nexperia?region=nac, Datasheet Link=https://assets.nexperia.com/documents/data-sheet/BSS138BKW.pdf, Height=1.1mm, Manufacturer_Part_Number=BSS138BKW,115, Mouser Price/Stock=https://www.mouser.co.uk/ProductDetail/Nexperia/BSS138BKW115?qs=A1cBxND5mHJ1Grk7RQmcgg%3D%3D
R1: "Thick Film Resistors - SMD 100 kOhms 125 mW 0805 5%", Manufacturer_Name=KEMET, Arrow Part Number=RC0805JR07100KL, Arrow Price/Stock=https://www.arrow.com/en/products/rc0805jr-07100kl/yageo?region=nac, Datasheet Link=https://www.yageo.com/upload/media/product/productsearch/datasheet/rchip/PYu-RC_Group_51_RoHS_L_11.pdf, Height=0.6mm, Manufacturer_Part_Number=RC0805JR07100KL
R2 R3 R4 R5 R6 R7 R8 R9 R10 R11 R12 R13 R14 R15 R16 R17 R18 R19 R20 R21 R22 R23 R24 R29: library part CRCW04020000Z0ED, "Resistors Thick Film  - SMD 0402 0.063 W 0 Ohm Jumper", Case Code (Imperial)=0402, Case Code (Metric)=1005, Manufacturer 1=Vishay, Max Operating Temperature=155°C, Max Power Dissipation=63mW, Min Operating Temperature=-55°C, Package Quantity=10000, Ratings=AEC-Q200, Resistance=0mR, Resistor Type="Thick Film", Supplier Part Number 1=541-0.0JCT-ND, Temperature Coefficient=100ppm/°C, Tolerance=5%, Voltage Rating=50V, Case/Package=0402, Category 1="Chip SMD Resistors", ComponentLink1Description=https://datasheet.ciiva.com/3255/dcrcwe3-3255944.pdf?src-supplier=Avnet, ComponentLink1URL=https://datasheet.ciiva.com/3255/dcrcwe3-3255944.pdf?src-supplier=Avnet, ComponentLink2Description=https://datasheet.ciiva.com/3255/dcrcwe3-3255945.pdf?src-supplier=Avnet, ComponentLink2URL=https://datasheet.ciiva.com/3255/dcrcwe3-3255945.pdf?src-supplier=Avnet, ComponentLink3Description=https://datasheet.ciiva.com/2461/dcrcwe3-2461962.pdf?src-supplier=Digi-Key, ComponentLink3URL=https://datasheet.ciiva.com/2461/dcrcwe3-2461962.pdf?src-supplier=Digi-Key, ComponentLink4Description=https://datasheet.ciiva.com/7841/1720486-7841802.pdf?src-supplier=Element14, ComponentLink4URL=https://datasheet.ciiva.com/7841/1720486-7841802.pdf?src-supplier=Element14, ComponentLink5Description=https://datasheet.ciiva.com/2461/dcrcwe3-2461964.pdf?src-supplier=Digi-Key, ComponentLink5URL=https://datasheet.ciiva.com/2461/dcrcwe3-2461964.pdf?src-supplier=Digi-Key, ComponentLink6Description=https://datasheet.ciiva.com/7841/1697337-7841468.pdf?src-supplier=Element14, ComponentLink6URL=https://datasheet.ciiva.com/7841/1697337-7841468.pdf?src-supplier=Element14, ComponentLink7Description=https://datasheet.ciiva.com/16761/70200976-16761309.pdf?src-supplier=Allied+Electronics, ComponentLink7URL=https://datasheet.ciiva.com/16761/70200976-16761309.pdf?src-supplier=Allied+Electronics, ComponentLink8Description=https://datasheet.ciiva.com/26311/fld-crcw-e3-data-en-26311550.pdf?src-supplier=Distrelec, ComponentLink8URL=https://datasheet.ciiva.com/26311/fld-crcw-e3-data-en-26311550.pdf?src-supplier=Distrelec, Construction=Rectangular, Contact Plating=Tin, Depth=0.5mm, Description 1="CRCW Series 0402 0.063 W 0 Ohm Jumper Surface Mount Thick Film Chip Resistor", Features="Automotive AEC-Q200", Height=0.35mm, Lead Free="Lead Free", Length=1mm, Manufacturer Part Number 1=CRCW04020000Z0ED, Military Standard=Not, Number of Terminations=2, Packaging="Tape and Reel", Power Rating=63mW, Pricing 1="1=0,1, 10=0,029, 25=0,0208, 50=0,016, 100=0,0118, 250=0,009, 500=0,0072, 1000=0,0053, 5000=0,0038 (USD)", Radiation Hardening=No, Reach SVHC Compliant=Unknown, RoHS 1=Yes, RoHS Compliant=Yes, Series=CRCW, Size Code=0402, Stock 1=170588, Supplier 1=Digi-Key, Termination=SMD/SMT, Voltage Rating (DC)=50V, Weight=2.3E-05oz, Width=0.5mm
R25: library part CRCW0201100KFNED, "Resistors Thick Film  - SMD 1/20watt 100Kohms 1% 200ppm", Manufacturer_Name=Vishay, Mouser Part Number=71-CRCW0201100KFNED, Arrow Part Number=CRCW0201100KFNED, Arrow Price/Stock=https://www.arrow.com/en/products/crcw0201100kfned/vishay?region=nac, Datasheet Link=http://www.vishay.com/docs/20035/dcrcwe3.pdf, Height=0.28mm, Manufacturer_Part_Number=CRCW0201100KFNED, Mouser Price/Stock=https://www.mouser.co.uk/ProductDetail/Vishay-Dale/CRCW0201100KFNED?qs=IQLUlsvFoXuZOEgCEo70BA%3D%3D
R26: "Thick Film Resistors - SMD 464 kOhms 62.5 mW 0402 1%", Manufacturer_Name=KEMET, Datasheet Link=http://www.yageo.com/documents/recent/PYu-RC0402_51_RoHS_L_6_r.pdf, Height=0.4mm, Manufacturer_Part_Number=RC0402FR-07464KL
R27: "Thick Film Resistors - SMD 499K Ohm 1% 63 mW 0402 1%", Manufacturer=Yageo, Category="Chip SMD Resistors", ComponentLink1Description=https://datasheet.ciiva.com/15189/getdatasheetpartid-323686-15189469.pdf?src-supplier=Verical, ComponentLink1URL=https://datasheet.ciiva.com/15189/getdatasheetpartid-323686-15189469.pdf?src-supplier=Verical, ComponentLink2Description=https://datasheet.ciiva.com/2491/pyu-r-int-thick-7-2491264.pdf?src-supplier=Digi-Key, ComponentLink2URL=https://datasheet.ciiva.com/2491/pyu-r-int-thick-7-2491264.pdf?src-supplier=Digi-Key, ComponentLink3Description=https://datasheet.ciiva.com/2491/pyu-r-int-thick-7-2491265.pdf?src-supplier=Digi-Key, ComponentLink3URL=https://datasheet.ciiva.com/2491/pyu-r-int-thick-7-2491265.pdf?src-supplier=Digi-Key, ComponentLink4Description=https://datasheet.ciiva.com/2491/pyu-r-int-thick-7-2491266.pdf?src-supplier=Digi-Key, ComponentLink4URL=https://datasheet.ciiva.com/2491/pyu-r-int-thick-7-2491266.pdf?src-supplier=Digi-Key, ComponentLink5Description=https://datasheet.ciiva.com/5558/pyu-rc0402-51-rohs-l-6-r-5558345.pdf?src-supplier=Mouser, ComponentLink5URL=https://datasheet.ciiva.com/5558/pyu-rc0402-51-rohs-l-6-r-5558345.pdf?src-supplier=Mouser, Manufacturer Part Number=RC0402FR-07499KL, Pricing 1="10000=0,001, 50000=0,001, 300000=0,0009, 1000000=0,0009, 3000000=0,0008 (USD)", RoHS=Yes, Stock 1=1780000, Supplier 1="Future Electronics"
R28: "RES SMD 100K OHM 1% 1/16W 0402", Manufacturer=Yageo, Category="Chip SMD Resistors", ComponentLink1Description=https://datasheet.ciiva.com/8887/pyu-rt-1-to-0-05-rohs-l-4-8887887.pdf?src-supplier=Avnet, ComponentLink1URL=https://datasheet.ciiva.com/8887/pyu-rt-1-to-0-05-rohs-l-4-8887887.pdf?src-supplier=Avnet, ComponentLink2Description=https://datasheet.ciiva.com/8887/pyu-rt-1-to-0-05-rohs-l-4-8887978.pdf?src-supplier=Avnet, ComponentLink2URL=https://datasheet.ciiva.com/8887/pyu-rt-1-to-0-05-rohs-l-4-8887978.pdf?src-supplier=Avnet, ComponentLink3Description=https://datasheet.ciiva.com/12836/pyu-rt-1-to-0-05-rohs-l-4-12836651.pdf?src-supplier=Mouser, ComponentLink3URL=https://datasheet.ciiva.com/12836/pyu-rt-1-to-0-05-rohs-l-4-12836651.pdf?src-supplier=Mouser, Manufacturer Part Number=RT0402FRE07100KL, Pricing 1="10000=0,0036, 40000=0,0034, 150000=0,0032, 250000=0,0031, 500000=0,003 (USD)", RoHS=Yes, Stock 1=10000, Supplier 1="Future Electronics"
SW1: "SW SPST PB 50MA 12V SMT CK variant", Manufacturer=C&K, Manufacturers Part Number="PTS820J2xM SMTR LFS", Supplier Part Number 1=611-PTS820J25MSMTR, Distributor 1=EBV, Distributor 2="Future Electronics", Supplier 1=Mouser, Supplier 2=Digi-Key, Supplier Part Number 2=CKN10505CT-ND

## Free pads (board coordinates)
  round 2.54 hole 2.54 unplated: MH1(48.26,22.86) MH2(48.26,5.08)

## Via types
v1: diameter 0.6, hole 0.3, Top Layer to Bottom Layer, tented both sides, 183 vias
v2: diameter 0.4, hole 0.2, Top Layer to Bottom Layer, tented both sides, 29 vias
v3: diameter 0.6, hole 0.3, Top Layer to Bottom Layer, tented bottom, 14 vias
v4: diameter 0.6, hole 0.3, Top Layer to Bottom Layer, tented top, 11 vias
v5: diameter 0.4, hole 0.2, Top Layer to Bottom Layer, tented top, 8 vias
v6: diameter 1.27, hole 0.711, Top Layer to Bottom Layer, tented top, 3 vias
v7: diameter 1.27, hole 0.711, Top Layer to Bottom Layer, tented bottom, 2 vias
v8: diameter 1.27, hole 0.711, Top Layer to Bottom Layer, tented both sides, 1 vias

## Nets (pads, with @x,y where several pads share a name; then routed paths per layer and width w, separated by ;. In a path a pad name is that pad's centre, name@x,y a point inside that pad or via, vN(x,y) a via of type N, cw(c..) or ccw(c..) an arc to the next point about the centre after c; other vN are vias at no path point)
A0: J3.12 R29.2 | length 2.5
  Top Layer w0.254: J3.12 R29.2
A1: J3.11 R21.2 | length 6
  Top Layer w0.254: J3.11 31.75,2.65 32.133,3.033 32.133,3.057 32.258,3.182 R21.2
A2: J3.10 R22.2 | length 3.4
  Top Layer w0.254: J3.10 29.21,7.497 29.672,7.959 R22.2
A3: J3.09 R2.2 | length 7.6
  Top Layer w0.254: J3.09 26.67,2.65 26.162,3.158 26.162,8.224 26.67,8.732 R2.2
D4: J3.01 R13.2 | length 7.1
  Top Layer w0.254: J3.01 6.35,2.65 7.112,3.412 7.112,8.451 7.261,8.6 7.32,8.6 7.493,8.773 R13.2
D5: J2.10 R4.2 | length 7.2
  Top Layer w0.254: R4.2 38.354,20.32 39.116,21.082 39.116,25.425 J2.10
D6: J2.09 R3.2 | length 3.5
  Top Layer w0.254: R3.2 J2.09
D9: J2.08 R12.2 | length 6.8
  Top Layer w0.254: R12.2 34.036,25.425 J2.08
D10: J2.07 R9.2 | length 3.5
  Top Layer w0.254: R9.2 J2.07
D11: J2.06 R10.2 | length 6.7
  Top Layer w0.254: R10.2 J2.06
D12: J2.05 R7.2 | length 3.5
  Top Layer w0.254: R7.2 26.67,22.474 J2.05
D13: J2.04 R8.2 | length 6.7
  Top Layer w0.254: R8.2 J2.04
D24: J3.08 R18.2 | length 3.4
  Top Layer w0.254: J3.08 R18.2
D25: J3.07 R15.2 | length 6.6
  Top Layer w0.254: J3.07 R15.2
DBG_RF-BUSY: R15.1 SMD1.27 | length 10.8
  Top Layer w0.254: v3(20.32,7.62) 20.32,9.271 20.997,9.948 R15.1
  Bottom Layer w0.254: SMD1.27@14.622,4.659 14.622,5.732 16.51,7.62 v3(20.32,7.62)
DBG_RF-NRST: R18.1 SMD1.28 | length 11.2
  Top Layer w0.254: v3(22.954,7.543) 22.954,9.28 23.598,9.924 24.106,9.924 R18.1
  Bottom Layer w0.254: SMD1.28@16.654,4.659 16.764,4.659 16.764,5.588 17.526,6.35 21.761,6.35 v3(22.954,7.543)
DBG_SWCLK: J4.4 SMD1.25 | length 15.3
  Bottom Layer w0.254: J4.4 4.658,13.843 6.096,12.405 6.096,10.16 7.842,8.414 7.842,7.271 8.569,6.544 10.713,6.544 10.922,6.753 10.922,7.874 11.778,8.73 SMD1.25@12.533,8.73
DBG_SWDIO: J4.2 SMD1.26 | length 13.8
  Bottom Layer w0.254: J4.2 4.445,11.938 4.445,9.017 7.935,5.527 11.363,5.527 SMD1.26@12.533,6.698
DBG_SWO: R12.1 R23.2 SMD1.23 | length 34.5
  Top Layer w0.254: v3(30.48,16.256) 32.502,16.256 34.036,17.79 R12.1
  Bottom Layer w0.254: R23.2 10.16,18.415 10.922,17.653 10.922,12.954 11.303,12.573 SMD1.23 12.355,12.736 13.498,12.736 16.764,16.002 30.158,16.002 30.412,16.256 v3(30.48,16.256)
EN: J2.02 Q2.1 | length 26.6
  Top Layer w0.254: J2.02 19.304,25.465 19.304,19.685 18.034,18.415 16.002,18.415 15.367,17.78 15.367,16.011 16.138,15.24 20.036,15.24 21.545,13.731 Q2.1
F_3V3: J3.14 J3.15 J4.1 SMD1.30 SMD1.31 SMD1.32 | length 76.2
  Top Layer w0.254: v4(2.921,9.144) 3.81,9.144 5.33,7.624 5.33,3.679 4.572,2.921 4.572,1.143 5.207,0.508 27.559,0.508 28.448,1.397 28.448,3.302 27.748,4.002 v7(27.748,7.523)
  Top Layer w0.6: J3.14@39.292,5.933 39.37,5.855 J3.14 39.37,4.97 39.58,4.76 J3.14@39.588,4.76 ; J3.15@41.488,2.86 41.7,2.86 41.91,2.65 J3.15
  Top Layer w0.8: v7(27.748,7.523) 27.748,7.65 28.067,7.968 28.067,9.888 29.355,11.176 35.01,11.176 35.941,10.245 35.941,8.841 J3.14 ; J3.14@39.588,4.76 J3.15@41.488,2.86
  Bottom Layer w0.254: J4.1@2.54,12.522 2.18,12.162 2.18,9.885 v4(2.921,9.144)
  Bottom Layer w0.6: J4.1@2.54,12.522 J4.1
  Bottom Layer w0.8: SMD1.30 SMD1.32 ; SMD1.32@24.563,4.538 24.563,5.513 26.573,7.523 v7@27.746,7.523
F_MISO: J3.04 R20.2 | length 3.4
  Top Layer w0.254: J3.04 R20.2
F_MOSI: J3.05 R11.2 | length 6.6
  Top Layer w0.254: J3.05 R11.2
F_NRST: J3.16 R17.2 | length 2.3
  Top Layer w0.254: J3.16 R17.2
F_RX: J3.03 R6.2 | length 6.6
  Top Layer w0.254: J3.03 R6.2
F_SCK: J3.06 R19.2 | length 3.4
  Top Layer w0.254: J3.06 R19.2
F_TX: J3.02 R5.2 | length 3.4
  Top Layer w0.254: J3.02 R5.2
GND: C1.1 C2.1 C3.2 C4.1 C5.1 C7.1 C8.1 IC1.1 J1.2 J1.3 J3.13 J4.5 MP1.1 Q2.2 R24.1 R25.2 R28.1 SMD1.6 SMD1.13 SMD1.14 SMD1.15 SMD1.16 SMD1.17 SMD1.19 SMD1.20 SMD1.21 SMD1.29 SW1.1 SW1.G1 SW1.G2 SW1.G3 SW1.G4 | length 3.3
  Top Layer w0.254: v4(10.015,21.954) 10.024,21.963 11.01,21.963 C3.2 ; v4(10.142,25.25) 10.154,25.261 11.006,25.261 C2.1
  Bottom Layer w0.254: C8.1 45.243,11.588 46.197,11.588 v8(46.355,11.43)
  other v1: 1.2,1.428 2.4,1.428 3.6,1.428 38.4,1.428 39.6,1.428 40.8,1.428 43.2,1.428 46.8,1.428 48,1.428 49.2,1.428 7.8,2.628 13.8,2.628 18.6,2.628 39,2.628 40.2,2.628 43.8,2.628 45,2.628 47.4,2.628 48.6,2.628 49.8,2.628 8.4,3.828 37.2,3.828 38.4,3.828 42,3.828 43.2,3.828 44.4,3.828 46.8,3.828 12.6,5.028 36.6,5.028 37.8,5.028 41.4,5.028 42.6,5.028 22.8,6.228 15,7.428 39,7.428 40.2,7.428 41.4,7.428 49.8,7.428 46.742,8.203 6,8.628 15.6,8.628 18,8.628 25.2,8.628 5.4,9.828 15,9.828 17.4,9.828 25.8,9.828 49.8,9.828 38.4,11.028 7.8,12.228 17.4,12.228 21,12.228 22.2,12.228 23.4,12.228 24.6,12.228 25.8,12.228 27,12.228 30.6,12.228 49.8,12.228 7.2,13.428 8.4,13.428 18,13.428 19.2,13.428 46.8,13.428 6.6,14.628 7.8,14.628 49.8,14.628 1.2,15.828 7.2,15.828 8.4,15.828 44.4,15.828 45.6,15.828 46.8,15.828 3,17.028 6.6,17.028 7.8,17.028 25.8,17.028 28.2,17.028 45,17.028 46.2,17.028 49.8,17.028 1.2,18.228 2.4,18.228 3.6,18.228 4.8,18.228 14.4,18.228 19.2,18.228 20.4,18.228 43.2,18.228 48,18.228 1.8,19.428 3,19.428 4.2,19.428 13.8,19.428 15,19.428 43.8,19.428 49.8,19.428 1.2,20.628 4.8,20.628 6,20.628 7.2,20.628 10.8,20.628 14.4,20.628 15.6,20.628 20.4,20.628 45.6,20.628 49.2,20.628 5.4,21.828 6.6,21.828 7.8,21.828 18.6,21.828 40.2,21.828 43.8,21.828 49.8,21.828 6,23.028 7.2,23.028 9.6,23.028 18,23.028 20.4,23.028 22.8,23.028 43.2,23.028 5.4,24.228 6.6,24.228 31.8,24.228 37.8,24.228 41.4,24.228 42.6,24.228 46.2,24.228 49.8,24.228 1.2,25.428 6,25.428 32.4,25.428 37.2,25.428 40.8,25.428 42,25.428 45.6,25.428 46.8,25.428 48,25.428 49.2,25.428 1.8,26.628 5.4,26.628 25.8,26.628 36.6,26.628 46.2,26.628 47.4,26.628 48.6,26.628 49.8,26.628 1.2,27.828 2.4,27.828 4.8,27.828 6,27.828 19.2,27.828 26.4,27.828 38.4,27.828 42,27.828 43.2,27.828 44.4,27.828 45.6,27.828 46.8,27.828 48,27.828 49.2,27.828 1.8,29.028 5.4,29.028 16.2,29.028 17.4,29.028 18.6,29.028 19.8,29.028 21,29.028 22.2,29.028 23.4,29.028 24.6,29.028 25.8,29.028 27,29.028 28.2,29.028 29.4,29.028 40.2,29.028 41.4,29.028 42.6,29.028 43.8,29.028 45,29.028 46.2,29.028 47.4,29.028 48.6,29.028
  other v2: 10.528,21.198 11.18,21.198 11.832,21.198 12.485,21.198 13.137,21.198 13.79,21.243 14.274,21.682 14.691,22.187 10.271,22.724 10.923,22.724 14.716,22.84 10.795,23.292 14.381,23.402 13.888,23.831 13.234,23.855 10.795,23.945 13.234,24.507 10.795,24.597 13.234,25.16 12.707,25.53 10.984,26.117 12.839,26.373 13.492,26.373 14.144,26.373 14.797,26.373 14.797,28.33 9.235,28.885 14.797,28.983 11.866,29.409
  other v4: 35.565,7.173
  other v5: 10.142,24.597 10.154,25.914 9.527,26.379 9.235,26.928 14.797,27.025 9.235,27.58 14.797,27.678 9.235,28.233
I2C_SCL: R16.1 SMD1.34 | length 25.5
  Top Layer w0.254: v4(40.005,18.796) 41.868,18.796 R16.1
  Bottom Layer w0.254: SMD1.34 28.513,4.438 28.886,4.811 28.886,5.391 29.21,5.715 31.437,5.715 31.818,5.334 33.528,5.334 34.163,5.969 34.163,10.287 35.179,11.303 36.068,11.303 36.703,11.938 36.703,17.018 38.481,18.796 v4(40.005,18.796)
I2C_SDA: R14.1 SMD1.33 | length 29.7
  Top Layer w0.254: v4(39.878,17.145) 43.486,17.145 44.762,18.421 R14.1
  Bottom Layer w0.254: SMD1.33@26.814,4.659 26.814,3.92 27.559,3.175 32.512,3.175 34.925,5.588 35.687,5.588 36.672,6.573 36.672,10.091 37.719,11.138 37.719,14.986 v4(39.878,17.145)
LPUART_RX: R6.1 SMD1.4 | length 24.6
  Top Layer w0.254: R6.1 11.43,11.176 12.827,12.573 14.14,12.573 14.589,12.124 v3(14.654,12.124)
  Bottom Layer w0.254: v3(14.654,12.124) 15.299,12.124 17.78,14.605 32.646,14.605 SMD1.4@32.933,14.892
LPUART_TX: R5.1 SMD1.5 | length 30.3
  Top Layer w0.254: R5.1 8.89,10.023 9.063,10.196 9.138,10.196 9.398,10.456 9.398,14.859 11.623,17.084 14.031,17.084 v3(14.097,17.018)
  Bottom Layer w0.254: v3(14.097,17.018) 20.701,17.018 21.498,17.815 30.953,17.815 31.496,17.272 32.585,17.272 SMD1.5@32.933,16.924
NetC2_2: C2.2 J1.1 L1.2 | length 2.1
  Top Layer w0.6: L1.2@11.938,24.337 C2.2 J1.1
NetC3_1: C3.1 L1.1 SMD1.18 | length 1.2
  Bottom Layer w0.6: SMD1.18@12.533,22.954 12.533,22.934 12.733,22.734 13.461,22.734 v7(13.589,22.606)
NetC6_1: C6.1 IC1.5 R26.1 R28.2 | length 4.1
  Bottom Layer w0.3: C6.1@43.307,10.033 IC1.5
  Bottom Layer w0.4: R28.2 R26.1 42.122,10.033 43.307,10.033 C6.1
NetD1_1: D1.1 D2.1 Q1.3 R1.1 | length 18.5
  Top Layer w0.6: D1.1 17.018,16.916 21.61,16.916 D2.1 21.61,16.855 23.484,14.981 R1.1 Q1.3
NetIC1_2: IC1.2 L2.1 | length 1.6
  Bottom Layer w0.254: IC1.2 43.307,14.765 L2.1
NetJ4_6: J4.6 R23.1 R24.2 | length 6.1
  Bottom Layer w0.254: J4.6 5.207,15.113 5.8,15.706 R23.1 R24.2
NetQ1_1: Q1.1 Q2.3 R1.2 | length 6.8
  Top Layer w0.6: Q2.3 R1.2 35.534,13.081 36.474,14.021 Q1.1
NetR7_1: R7.1 SMD1.11 | length 8.3
  Top Layer w0.254: v3(25.335,20.741) 25.335,18.607 26.077,17.865 R7.1
  Bottom Layer w0.254: v3(25.335,20.741) 25.335,22.414 26.428,23.507 SMD1.11
NetR8_1: R8.1 SMD1.12 | length 8.6
  Top Layer w0.254: v3(23.114,20.828) 23.114,18.415 23.618,17.911 24.126,17.911 R8.1@24.15,17.887
  Bottom Layer w0.254: v3(23.114,20.828) 23.114,22.352 24.384,23.622 24.384,24.706 SMD1.12@24.737,25.059
NetR21_1: R21.1 SMD1.1 | length 2
  Top Layer w0.254: v3(31.733,9.225) 31.799,9.159 32.158,9.159 R21.1
  Bottom Layer w0.254: v3(31.733,9.225) 32.56,9.225 32.933,8.852 SMD1.1@32.933,8.796
NetR22_1: R22.1 SMD1.0 | length 5.7
  Top Layer w0.254: v3(29.776,9.653) 29.834,9.653 30.353,9.134 R22.1
  Bottom Layer w0.254: v3(29.776,9.653) 29.776,8.832 31.844,6.764 SMD1.0@32.933,6.764
NRST: C1.2 J4.3 R17.1 SMD1.35 SW1.2 | length 86.9
  Top Layer w0.254: v4(1.778,13.843) 4.699,13.843 5.842,14.986 5.842,17.907 8.744,20.809 8.744,24.619 C1.2 8.89,24.802 8.89,26.234 7.79,27.334 SW1.2 ; v4(30.734,3.983) 30.734,3.937 29.972,3.175 29.972,1.143 30.48,0.635 44.196,0.635 45.974,2.413 45.974,7.747 44.982,8.739 44.516,8.739 R17.1
  Bottom Layer w0.254: J4.3 v4(1.778,13.843) 1.143,13.208 1.143,9.144 2.286,8.001 3.683,8.001 6.223,5.461 6.223,2.921 8.382,0.762 v4(30.389,0.762) ; v4(30.734,3.983) 30.734,4.515 SMD1.35@30.878,4.659
SCL: J2.11 R16.2 | length 2.6
  Top Layer w0.254: R16.2 41.91,22.474 J2.11
SDA: J2.12 R14.2 | length 6.2
  Top Layer w0.254: J2.12 44.762,25.406 R14.2
SPI_MISO: R20.1 SMD1.2 | length 19.9
  Top Layer w0.254: R20.1 13.973,9.951 v3(13.973,10.837)
  Bottom Layer w0.254: v3(13.973,10.837) 13.977,10.84 14.003,10.828 SMD1.2@32.933,10.828
SPI_MOSI: R11.1 SMD1.22 | length 7.9
  Top Layer w0.254: v3(14.016,15.194) 16.51,12.7 R11.1
  Bottom Layer w0.254: SMD1.22@12.533,14.826 12.901,15.194 v3(14.016,15.194)
SPI_NSS: R13.1 SMD1.24 | length 5.9
  Top Layer w0.254: R13.1 7.513,9.968 7.513,10.877 v4(7.532,10.897)
  Bottom Layer w0.254: v4(7.532,10.897) 7.626,10.897 7.985,10.538 SMD1.24@12.309,10.538
SPI_SCK: R19.1 SMD1.3 | length 16.1
  Top Layer w0.254: R19.1 v3(19.05,11.684)
  Bottom Layer w0.254: v3(19.05,11.684) 20.447,13.081 32.219,13.081 32.592,12.708 SMD1.3
VBAT: D1.2 J2.01 | length 2.8
  Top Layer w0.6: J2.01 16.53,20.463 17.018,19.975 D1.2
VBUS: D2.2 J2.03 | length 2.6
  Top Layer w0.6: D2.2 J2.03
VDD: C8.2 IC1.3 Q1.2 R27.2 | length 20
  Top Layer w0.3: Q1.2@37.012,15.941 38.608,14.345 38.608,13.077 37.592,12.061 37.592,10.29 39.061,8.82 39.567,8.82 v4(39.624,8.763)
  Top Layer w0.6: Q1.2 37.012,15.941 41.463,15.941 43.053,14.351 v6(45.72,14.351)
  Bottom Layer w0.3: R27.2@38.735,8.773 v4@39.614,8.773
  Bottom Layer w0.6: R27.2@38.735,8.773 R27.2 ; v4@39.614,8.773 v4(39.624,8.763)
VPA_EN: C4.2 C5.2 IC1.4 R9.1 R25.1 SMD1.9 | length 44.4
  Top Layer w0.254: v3(30.48,20.828) 30.48,18.542 31.157,17.865 R9.1
  Bottom Layer w0.254: v3(30.48,20.828) 30.48,22.479 30.492,22.491 SMD1.9 ; SMD1.9@30.833,25.079 30.965,25.211 30.986,25.211 31.75,25.976 31.75,28.321 32.131,28.702 36.205,28.702 39.611,25.296 39.611,24.684 44.166,20.13 44.767,20.13 47.625,17.272 C5.2@47.625,10.113 ; IC1.4 43.807,11.521 45.139,10.189 45.647,10.189 45.72,10.116 R25.1 45.726,10.017 46.73,10.017 C4.2 46.771,10.058 47.59,10.058 C5.2
VPA_PGOOD: IC1.6 R10.1 R27.1 SMD1.10 | length 67.1
  Top Layer w0.254: v3(27.94,20.741) 27.94,18.542 28.617,17.865 R10.1